# EAGLE board icsp (EAGLE 6.5.0)
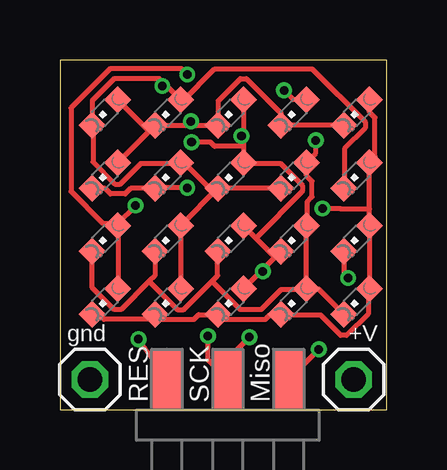
[diagram p0: board, top side]
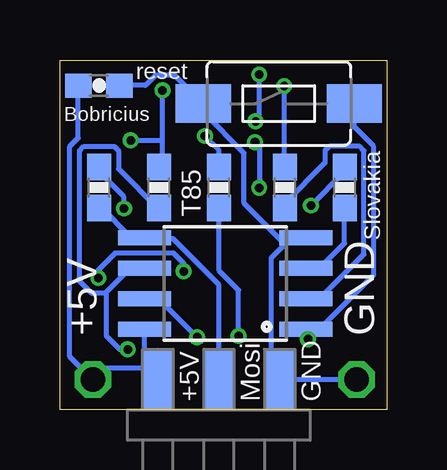
[diagram p1: board, bottom side, seen from below]

Size 13.62 x 14.56 mm. Coordinates in mm from the lower left corner, seen from the top.
Outline: 0,14.56 0,0 13.62,0 13.62,14.56 0,14.56
Copper layers (1*16): Top 0.035mm / dielectric 1.5mm / Bottom 0.035mm
Design rules "ITEADstudio_DRC": minimum track width 6mil, minimum drill 12mil, track to track 6mil, track to pad 6mil, pad to pad 6mil, via to via 6mil, smd to smd 0mil, copper to edge 10mil, drill to drill 10mil, minimum pad ring 10mil, minimum via ring 6mil, stop-mask expansion 2mil, vias tented up to drill 100mil, thermal gap 10mil
Net classes: 0 default: width 0.203 mm, drill 0.356 mm, clearance 0.203 mm; 2 pwr: width 0.203 mm, drill 0.356 mm, clearance 0.203 mm

## Footprints (pad centres in the part's own frame; a part is rotated, then mirrored left to right if it is on the bottom)
0603-CAP = smd 1.1 x 1: 1 -0.85,0; 2 0.85,0
6_PIN_EDGE = smd 1.27 x 2.54: 1 2.54,0; 3 0,0; 5 -2.54,0 | smd 1.27 x 2.54 bottom: 2 2.54,0; 4 0,0; 6 -2.54,0
1X01 = drill 1.016 octagon: 1 0,0
CHIPLED_0603 = smd 0.8 x 0.8: A 0,-0.75; C 0,0.75
0603-RES = smd 1.1 x 1: 1 -0.85,0; 2 0.85,0
TACTILE-SWITCH-1101NE = smd 2.3 x 1.6: P$1 -3.15,0; P$2 3.15,0
SO08-EIAJ = smd 0.61 x 2.21: 1 -1.905,-3.378; 2 -0.635,-3.378; 3 0.635,-3.378; 4 1.905,-3.378; 5 1.905,3.353; 6 0.635,3.353; 7 -0.635,3.353; 8 -1.905,3.353

## Placement (x,y rotation side)
C4  0.1uf  [0603-CAP]  12,13.5 0 bottom
ISP  6_PIN_ISPEDGE-NORM  [6_PIN_EDGE]  7,1.25 0 top
JP1  [1X01]  12.25,1.25 0 top
JP2  [1X01]  1.25,1.25 0 top
LED1  [CHIPLED_0603]  12.38,12.38 135 top
LED2  [CHIPLED_0603]  12.38,9.75 135 top
LED3  [CHIPLED_0603]  12.38,7.12 135 top
LED4  [CHIPLED_0603]  12.38,4.5 135 top
LED5  [CHIPLED_0603]  9.75,12.38 135 top
LED6  [CHIPLED_0603]  9.75,9.75 135 top
LED7  [CHIPLED_0603]  9.75,7.12 135 top
LED8  [CHIPLED_0603]  9.75,4.5 135 top
LED9  [CHIPLED_0603]  7.12,12.38 135 top
LED10  [CHIPLED_0603]  7.12,9.75 135 top
LED11  [CHIPLED_0603]  7.12,7.12 135 top
LED12  [CHIPLED_0603]  7.12,4.5 135 top
LED13  [CHIPLED_0603]  4.5,12.38 135 top
LED14  [CHIPLED_0603]  4.5,9.75 135 top
LED15  [CHIPLED_0603]  4.5,7.12 135 top
LED16  [CHIPLED_0603]  4.5,4.5 135 top
LED17  [CHIPLED_0603]  1.88,12.38 135 top
LED18  [CHIPLED_0603]  1.88,9.75 135 top
LED19  [CHIPLED_0603]  1.88,7.12 135 top
LED20  [CHIPLED_0603]  1.88,4.5 135 top
R1  47R  [0603-RES]  12,9.25 270 bottom
R2  47R  [0603-RES]  9.5,9.25 270 bottom
R3  47R  [0603-RES]  7,9.25 270 bottom
R4  47R  [0603-RES]  4.25,9.25 270 bottom
R5  47R  [0603-RES]  1.75,9.25 270 bottom
RESET  [TACTILE-SWITCH-1101NE]  4.5,12.75 0 bottom
U1  AtTiny85  [SO08-EIAJ]  6.75,5.25 90 bottom

## Library data of the parts
C4 R1-R5 RESET = SparkFun
ISP = ppeter
JP1 JP2 = pinhead
LED1-LED20 = led
U1 = SparkFun-DigitalIC; PROD_ID: IC-09092

## Nets
GND: C4.2 ISP.6 JP2.1 RESET.P$1 U1.4
N$6: LED1.A LED2.A LED3.A LED4.A LED8.C LED12.C LED16.C LED20.C R1.1
N$7: LED4.C LED5.A LED6.A LED7.A LED8.A LED11.C LED15.C LED19.C R2.1
N$8: LED3.C LED7.C LED9.A LED10.A LED11.A LED12.A LED14.C LED18.C R3.1
N$9: LED2.C LED6.C LED10.C LED13.A LED14.A LED15.A LED16.A LED17.C R4.1
N$10: LED1.C LED5.C LED9.C LED13.C LED17.A LED18.A LED19.A LED20.A R5.1
PIN1: ISP.1 R2.2 U1.6
RES: ISP.5 RESET.P$2 U1.1
SCL: ISP.3 R3.2 U1.7
SDA: ISP.4 R1.2 U1.5
USBM: R4.2 U1.2
USBP: R5.2 U1.3
VCC [pwr]: C4.1 ISP.2 JP1.1 U1.8

## Tracks (layer width: path | path; a pad name or v marks a point on that pad's centre or on a via)
GND
  Bottom 0.203: C4.2 11.13,13.5 10.06,13.5 9.63,13.94 8.84,13.94 7.68,12.77 RESET.P$1 7.6,12.67 7.6,12.34 5.95,10.68 5.95,8.6 4.3,6.95 U1.4 3.38,7.15 3.97,7.15 4.8,6.32 4.8,1.59 4.47,1.26 ISP.6 4.37,1.26 1.27,1.26 JP2.1
N$6  (via drill 0.36)
  Top 0.203: LED20.C 1.35,3.95 1.63,3.95 1.84,3.75 3.76,3.75 3.97,3.95 LED16.C 3.89,3.75 5.59,3.75 5.79,3.95 6.58,3.95 LED12.C 6.68,3.93 6.86,3.75 8.56,3.75 8.77,3.95 9.2,3.95 LED8.C 9.3,3.93 10.88,3.93 11.71,3.09 11.97,3.09 12.86,3.98 12.86,4.94 LED4.A 12.91,5.05 12.91,7.64 LED3.A 12.91,7.74 12.91,8.35 | 12.91,8.35 LED2.A 12.96,10.35 13.14,10.53 13.14,12.16 12.91,12.39 12.91,12.89 LED1.A | v10.95,8.37 11.69,8.37 11.71,8.35 12.91,8.35
  Bottom 0.203: v10.95,8.37 10.95,8.86 11.99,9.9 11.99,10.08 R1.1
N$7  (via drill 0.36)
  Top 0.203: 3.72,5.34 3.97,5.58 3.97,6.57 LED15.C | 3.72,5.34 2.54,4.16 2.26,4.16 1.35,5.07 1.35,6.57 LED19.C | 6.34,5.34 5.16,4.16 4.91,4.16 3.72,5.34 | 6.34,5.34 6.58,5.58 6.58,6.57 LED11.C | v9.35,13.3 9.73,12.92 10.27,12.92 LED5.A | LED8.A 10.29,5.02 10.8,5.02 LED4.C | LED8.A 10.29,5.12 10.29,7.64 LED7.A 10.32,7.74 10.32,8.65 10.52,8.86 10.52,9.52 10.29,9.74 10.29,10.28 LED6.A 10.34,10.35 10.67,10.68 v10.67,11.22 | 6.34,5.34 7.52,4.16 8.39,4.16 9.22,5 10.19,5 LED8.A
  Bottom 0.203: 9.35,11.22 9.35,10.23 9.48,10.1 R2.1 | 9.35,11.22 v9.35,13.3 | v10.67,11.22 9.35,11.22
N$8  (via drill 0.36)
  Top 0.203: 8.42,5.8 9.2,6.57 LED7.C 8.92,6.39 8.17,7.14 | 8.42,5.8 7.68,5.05 LED12.A | 8.17,7.14 7.68,7.64 LED11.A | v12.02,5.48 11.87,5.63 11.87,6.57 LED3.C | v8.46,5.76 8.42,5.8 | LED18.C 1.88,9.21 2.11,8.98 2.72,8.98 2.95,9.21 LED14.C 4.07,9.24 v5.31,9.24 | 7.65,11.4 7.65,12.89 LED9.A | 7.65,11.4 7.65,10.96 | 7.65,10.96 7.65,10.3 LED10.A 7.75,10.25 9.2,10.25 10.11,9.34 10.11,9.08 8.17,7.14 | v7.57,11.4 7.65,11.4 | v5.49,11.14 6.28,11.14 6.46,10.96 7.65,10.96
  Bottom 0.203: v12.02,5.48 12.02,5.83 11.33,6.52 8.89,6.52 8.46,6.09 v8.46,5.76 | v7.57,11.4 7.01,10.84 7.01,10.1 R3.1 | v5.31,9.24 5.31,10.96 v5.49,11.14
N$9  (via drill 0.36)
  Top 0.203: LED16.A 5.03,5.05 5.03,7.64 LED15.A 5.08,7.71 LED10.C | LED6.C 9.2,9.24 6.68,9.24 LED10.C | LED10.C 6.35,9.11 5.19,10.28 LED14.A 4.93,10.25 3.38,10.25 2.52,9.39 2.29,9.39 1.38,10.3 1.38,11.75 LED17.C 1.35,11.85 1.35,12.87 2.26,13.78 4.14,13.78 4.36,13.57 | 4.36,13.57 5.01,12.92 LED13.A 5.11,12.84 6.46,14.19 10.52,14.19 12.73,11.98 12.73,11.73 11.87,10.86 11.87,9.24 LED2.C | v4.27,13.48 4.36,13.57
  Bottom 0.203: v4.27,13.48 4.27,10.1 R4.1
N$10  (via drill 0.36)
  Top 0.203: LED20.A 2.42,5.05 2.42,7.64 LED19.A | v3.15,8.5 2.39,7.74 LED19.A | LED1.C 11.84,11.85 9.22,11.85 LED5.C 9.22,11.95 9.22,12.34 7.78,13.78 7.52,13.78 6.61,12.87 6.61,11.95 LED9.C 6.58,11.85 5.46,11.85 | LED18.A 2.42,10.3 3.97,11.85 LED13.C | 5.46,11.85 4.07,11.85 LED13.C | LED17.A 2.42,12.89 3.66,11.65 LED13.C | v5.31,13.96 5.08,14.19 2.09,14.19 0.46,12.56 0.46,9.08 1.78,7.76 2.29,7.76 LED19.A | v5.46,12.01 5.46,11.85
  Bottom 0.203: v3.15,8.5 1.76,9.9 1.76,10.08 R5.1 | v5.31,13.96 5.31,12.16 v5.46,12.01
PIN1  (via drill 0.36)
  Top 0.203: v10.8,2.51 9.55,1.26 ISP.1
  Bottom 0.203: 11.74,4.84 12.3,4.84 12.8,5.35 12.8,10.79 12.63,10.96 11.36,10.96 11.18,10.79 11.18,10.03 9.5,8.35 9.5,8.42 R2.2 | 11.74,4.84 10.7,5.88 10.11,5.88 U1.6 | v10.8,2.51 11.13,2.51 11.69,3.06 11.69,4.77 11.74,4.84
RES  (via drill 0.36)
  Top 0.203: v3.28,2.93 ISP.5
  Bottom 0.203: 3.36,2.86 3.11,3.01 v3.28,2.93 | 3.36,2.86 3.36,3.34 U1.1 | RESET.P$2 1.35,11.78 0.54,10.96 0.54,5.6 3.28,2.86 3.36,2.86
SCL  (via drill 0.36)
  Top 0.203: v6.18,3.06 6.18,2.07 ISP.3 6.63,1.74 v7.9,3.01
  Bottom 0.203: v6.18,3.06 6.18,4.97 6.99,5.78 R3.2 | v7.9,3.01 9.5,4.61 10.09,4.61 U1.7
SDA
  Bottom 0.203: R1.2 11.89,8.4 10.67,7.18 10.11,7.18 U1.5 10.01,7.13 8.92,7.13 7.01,5.22 7.01,1.26 ISP.4
USBM
  Bottom 0.203: R4.2 4.25,8.42 4.25,8.6 2.57,10.28 2.57,10.79 2.39,10.96 1.12,10.96 0.94,10.79 0.94,6.47 2.77,4.64 3.36,4.64 U1.2
USBP
  Bottom 0.203: R5.2 1.76,6.93 2.77,5.91 3.36,5.91 U1.3
VCC
  Bottom 0.203: U1.8 10.09,3.34 10.09,1.79 9.55,1.26 ISP.2 10.16,1.74 12.63,1.74 JP1.1 12.27,1.26 13.21,2.2 13.21,10.96 12.86,11.32 12.86,13.48 C4.1

## Text on the board
tNames: gnd | +V | RES | SCK | Miso
bNames: reset | Bobricius | T85 | Slovakia | GND | +5V | GND | Mosi | +5V